# Altium PCB EsoCore_Edge.PcbDoc (part 6 of 6)
Units mil, origin at the board's own origin, x right, y up, seen from the top; angles counter-clockwise.
Board outline 6732.28 x 3385.83 mil, 4 copper layers (Top Layer, Layer 1, Layer 2, Bottom Layer), stack 61.58 mil thick; 330 components, 239 nets, 1236 pads, 712 vias.
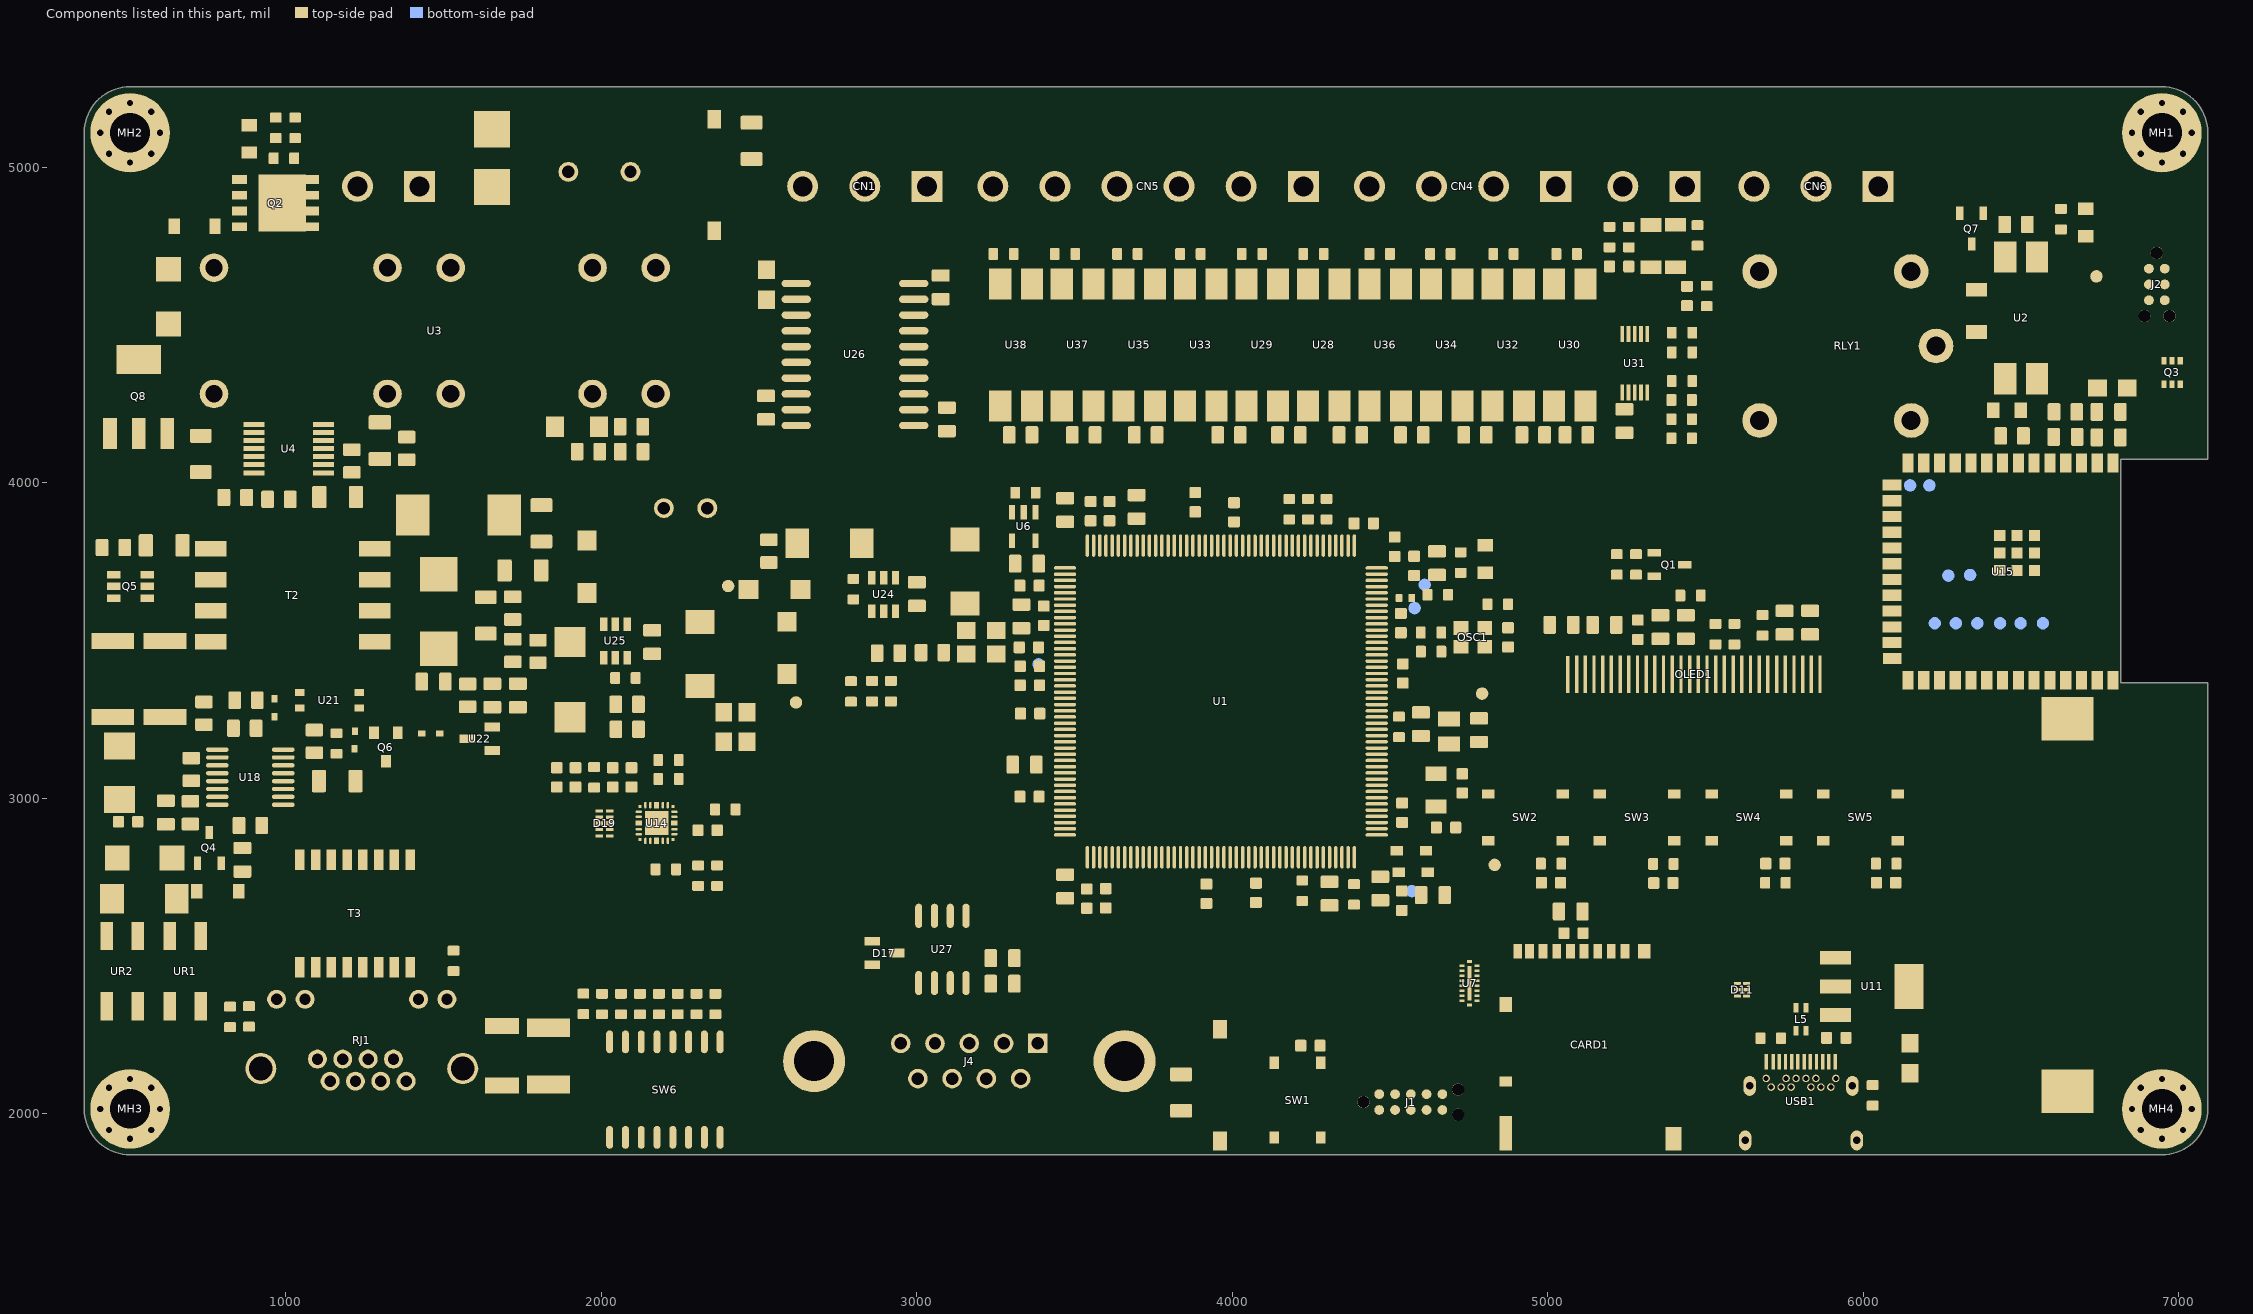
[diagram p7: the components of this part, seen from the top]

## Polygon pours and split planes (outlines as drawn) (continued)
NetCN2_1 on Top Layer "NONET_L-01_P-001" (solid, pour order 25): 1354.8,4993.1 cw(c1376.4,4993.1) 1376.4,5014.7 1730.2,5014.7 cw(c1730.2,4996.5) 1748.4,4996.5 1748.4,4799.3 cw(c1731.9,4799.3) 1731.9,4782.8 1380.9,4782.8 cw(c1380.9,4808.9) 1354.8,4808.9
NetCN2_2 on Top Layer "NONET_L-01_P-001" (solid, pour order 26): 905.46,4799.34 ccw(c925.9,4799.04) 925.6,4778.6 1301.8,4778.6 ccw(c1301.8,4797.1) 1320.3,4797.1 1320.3,4957.1 ccw(c1284.9,4957.1) 1284.9,4992.5 927,4992.5 ccw(c927,4970.96) 905.46,4970.96
EARTH_GND on Top Layer "NONET_L-01_P-001" (solid, pour order 121): 404,2410 ccw(c404,2368) 362,2368 362,2013.9 ccw(c507.64,2013.9) 507.64,1868.25 586.95,1872.17 1911,1882 1911,2166 ccw(c1876,2166) 1876,2201 1626.53,2201 cw(c1626.53,2267) 1560.53,2267 1560.53,2363.47 ccw(c1514,2363.47) 1514,2410
3V3 on Top Layer "NONET_L-01_P-001" (solid, pour order 27): 5092,2565 ccw(c5103.11,2564.89) 5103,2553.79 5148.79,2553.79 ccw(c5148.79,2566) 5161,2566 5161,2662 ccw(c5150,2662) 5150,2673 5099,2673 ccw(c5099,2666) 5092,2666
3V3 on Top Layer "NONET_L-01_P-001" (solid, pour order 30): 4707,2382 ccw(c4707,2374) 4699,2374 4699,2328 ccw(c4708,2328) 4708,2319 4728.29,2319 ccw(c4728.29,2328.42) 4737.71,2328.42 4737.71,2378.29 ccw(c4734,2378.29) 4734,2382
3V3 on Top Layer "NONET_L-01_P-001" (solid, pour order 31): 2013.39,1887.05 2013.39,1982.39 cw(c2027,1982.39) 2027,1996 2367.15,1996 cw(c2367.15,1970.37) 2392.77,1970.37 2392.77,1891.98 cw(c2383.58,1891.98) 2383.58,1882.79 2017.65,1882.79 cw(c2017.65,1887.05)
VBUS on Top Layer "NONET_L-01_P-001" (solid, pour order 32): 5845.33,2176.65 5846.33,2177.65 5846.33,2335.51 cw(c5853.12,2335.51) 5853.12,2342.3 5965.54,2342.3 5965.54,2288.86 cw(c5957.33,2288.86) 5957.33,2280.65 5910.97,2280.65 ccw(c5910.97,2275.03) 5905.35,2275.03 5905.35,2213.96 cw(c5900.33,2213.96) 5900.33,2208.94 5867.59,2208.94 ccw(c5867.59,2198.89) 5857.54,2198.89 5857.54,2178.81 cw(c5855.13,2178.81) 5855.13,2176.4
3V3 on Top Layer "NONET_L-01_P-001" (solid, pour order 33): 2496.31,3804.09 2496.31,3857.31 cw(c2510,3857.31) 2510,3871 2561,3871 cw(c2561,3867) 2565,3867 2565,3799.5 cw(c2558.44,3799.5) 2558.44,3792.94 2502.46,3792.94 cw(c2502.46,3795.55) 2499.84,3795.55
GND2 on Top Layer "NONET_L-01_P-001" (solid, pour order 120): 1001,3346 cw(c1012,3346) 1012,3357 1080,3357 cw(c1080,3348) 1089,3348 1089,3321 cw(c1080,3321) 1080,3312 1011,3312 cw(c1011,3322) 1001,3322
GND2 on Top Layer "NONET_L-01_P-001" (solid, pour order 119): 1080,3079 cw(c1096,3079) 1096,3095 1137,3095 cw(c1137,3084) 1148,3084 1148,3020 cw(c1138,3020) 1138,3010 1089,3010 cw(c1089,3019) 1080,3019
GND2 on Top Layer "NONET_L-01_P-001" (solid, pour order 118): 965,3147 965,3175 cw(c973,3175) 973,3183 1022,3183 cw(c1022,3176) 1029,3176 1029,3153 cw(c1023,3153) 1023,3147
GND2 on Top Layer "NONET_L-01_P-001" (solid, pour order 34): 949,2977 cw(c959,2977) 959,2987 1004,2987 cw(c1004,2984) 1007,2984 1007,2963 cw(c999,2963) 999,2955 954,2955 cw(c954,2960) 949,2960
GND2 on Top Layer "NONET_L-01_P-001" (solid, pour order 37): 766,2956 766,2980 cw(c774,2980) 774,2988 815,2988 cw(c815,2980) 823,2980 823,2950 cw(c815,2950) 815,2942 777,2942 cw(c777,2947) 772,2947
GND2 on Top Layer "NONET_L-01_P-001" (solid, pour order 38): 742,3122 742,3166 cw(c756,3166) 756,3180 812,3180 cw(c812,3170) 822,3170 822,3131 cw(c810,3131) 810,3119
NetC73_2 on Top Layer "NONET_L-01_P-001" (solid, pour order 117): 820,3766 ccw(c820,3775) 829,3775 829,3839 ccw(c815,3839) 815,3853 641,3853 ccw(c641,3847) 635,3847 635,3772 ccw(c641,3772) 641,3766
PVCC on Top Layer "NONET_L-01_P-001" (solid, pour order 42): 1186.17,3158.5 ccw(c1176.81,3158.5) 1176.81,3167.87 1057.87,3167.87 ccw(c1057.87,3155) 1045,3155 1046,3119 1175.72,3119 ccw(c1175.72,3129.46) 1186.17,3129.46
PVCC on Top Layer "NONET_L-01_P-001" (solid, pour order 111): 892,2859 ccw(c886,2859) 886,2865 790,2865 ccw(c790,2846) 771,2846 771,2753.43 ccw(c784,2753.43) 784,2740.43 806.43,2740.43 ccw(c806.43,2749) 815,2749 815,2808 cw(c820,2808) 820,2813 887,2813 ccw(c887,2818) 892,2818
PVCC on Top Layer "NONET_L-01_P-001" (solid, pour order 110): 726,3104 ccw(c726,3112) 734,3112 734,3163 ccw(c727,3163) 727,3170 659,3170 ccw(c659,3165) 654,3165 654,3108 ccw(c658,3108) 658,3104
PVCC on Top Layer "NONET_L-01_P-001" (solid, pour order 107): 945,3270 cw(c955,3270) 955,3280 993,3280 cw(c993,3274) 999,3274 999,3237 cw(c994,3237) 994,3232 949,3232 cw(c949,3236) 945,3236
GND2 on Top Layer "NONET_L-01_P-001" (solid, pour order 106): 382,3227 ccw(c384,3227) 384,3225 684,3225 ccw(c684,3235) 694,3235 694,3324 ccw(c682,3324) 682,3336 381,3336 ccw(c381,3328) 373,3328 373,3234 ccw(c379,3234) 379,3228
GND2 on Top Layer "NONET_L-01_P-001" (solid, pour order 105): 702,3522 cw(c718,3522) 718,3538 818,3538 cw(c818,3530) 826,3530 826,3433 cw(c813,3433) 813,3420 712,3420 cw(c712,3430) 702,3430
NetC73_2 on Top Layer "NONET_L-01_P-001" (solid, pour order 104): 554,3116 cw(c554,3095.64) 574.36,3095.64 574.36,2970.87 ccw(c590.25,2970.87) 590.25,2954.98 716.9,2954.98 ccw(c716.9,2966.57) 728.49,2966.57 728.49,3072.51 ccw(c712,3072.51) 712,3089 643,3089 cw(c643,3093) 639,3093 639,3203 ccw(c629,3203) 629,3213 416,3213 ccw(c416,3201) 404,3201 404,3119 ccw(c407,3119) 407,3116
GND on Top Layer "NONET_L01_P-001" (solid, remove dead copper, pour order 122): 999,2610 cw(c999,2624) 985,2624 985,2925 cw(c1011,2925) 1011,2951 1028.13,2951 ccw(c1028.34,2960.48) 1037.83,2960.27 cw(c1078.5,2911.5) 1078,2975 1116,2975 ccw(c1116,3008) 1149,3008 1149,3797 ccw(c1074,3797) 1074,3872 385,3872 cw(c384.5,3900.5) 356,3900 356,5111.61 cw(c499.39,5111.61) 499.39,5255 6939.67,5255 cw(c6939.67,5109) 7085.67,5109 7085.67,4073.57 cw(c7083.94,4073.57) 7083.94,4071.84 6810.08,4071.84 6810.08,3364.91 7080.28,3364.91 cw(c7080.28,3359.18) 7086,3359.18 7086,2014.84 cw(c6936.16,2014.84) 6936.16,1865 6661,1865 1956,1871 cw(c1956,1892) 1935,1892 1935,2201 ccw(c1915,2201) 1915,2221 1597,2221 cw(c1597,2227) 1591,2227 1591,2422 ccw(c1579.52,2422) 1579.52,2433.48 1483.26,2433.48 cw(c1483.26,2467.74) 1449,2467.74 1449,2584 ccw(c1423,2584) 1423,2610
NetC87_1 on Top Layer "NONET_L01_P-001" (solid, remove dead copper, pour order 103): 2337,3500 ccw(c2337,3519) 2356,3519 2356,3645 ccw(c2336.5,3645.5) 2337,3665 2147,3665 ccw(c2147,3648) 2130,3648 2132.06,3505.69 ccw(c2137.75,3505.69) 2137.75,3500
NetC72_2 on Top Layer "NONET_L01_P-001" (solid, remove dead copper, pour order 97): 1443.4,3767 1430,3767 ccw(c1430,3754.7) 1417.7,3754.7 1417.7,3627.2 ccw(c1433.38,3627.12) 1433.3,3611.44 1696.28,3611.44 ccw(c1696.28,3646.16) 1731,3646.16 1731,4670 ccw(c1676.5,4672.5) 1679,4727 1509,4727 ccw(c1509,4697) 1479,4697 1479,4066 ccw(c1522,4066) 1522,4023 cw(c1522,4007) 1538,4007 1538,3790 cw(c1515,3790) 1515,3767
NetR47_1 on Top Layer "NONET_L01_P-001" (solid, remove dead copper, pour order 96): 1219,3676 ccw(c1245,3676) 1245,3650 1352,3650 ccw(c1352,3669) 1371,3669 1371,3783.08 cw(c1390.46,3783.08) 1390.46,3802.54 1473.54,3802.54 ccw(c1473.54,3824) 1495,3824 1495,3949 ccw(c1456,3949) 1456,3988 1297,3988 ccw(c1297,3969) 1278,3969 1278,3919 cw(c1256,3919) 1256,3897 1235,3897 ccw(c1235,3878) 1216,3878
NetQ5_1 on Top Layer "NONET_L01_P-001" (solid, remove dead copper, pour order 95): 815,3750 cw(c815,3727) 838,3727 838,3674 cw(c819,3674) 819,3655 805,3655.25 461.99,3657.81 453,3659 cw(c453,3675) 437,3675 437,3729 cw(c458,3729) 458,3750
+VIN on Top Layer "NONET_L01_P-001" (solid, remove dead copper, pour order 43): 2878,3685.5 cw(c2868.4,3685.5) 2868.4,3675.9 2757.35,3675.9 cw(c2757.35,3685.25) 2748,3685.25 2748,3857 cw(c2758,3857) 2758,3867 2870,3867 cw(c2870,3859) 2878,3859
+VIN2 on Top Layer "NONET_L01_P-001" (solid, remove dead copper, pour order 94): 1881.44,3567.09 1881.44,3630.09 cw(c1910.44,3630.09) 1910.44,3659.09 2001.44,3659.09 cw(c2001.44,3646.09) 2014.44,3646.09 2014.44,3544.09 cw(c1998.44,3544.09) 1998.44,3528.09 1898.44,3528.09 cw(c1898.44,3544.09) 1882.44,3544.09
3V3 on Top Layer "NONET_L01_P-001" (solid, remove dead copper, pour order 93): 4521,3722 ccw(c4521,3736) 4535,3736 4535,3778 ccw(c4523,3778) 4523,3790 4424,3790 ccw(c4424,3783) 4417,3783 4417,3729 ccw(c4424,3729) 4424,3722
3V3 on Top Layer "NONET_L01_P-001" (solid, remove dead copper, pour order 92): 4669.95,3670.44 4718.56,3670.44 cw(c4718.56,3664) 4725,3664 4725,3620 cw(c4719,3620) 4719,3614 4676,3614 cw(c4676,3621) 4669,3621
VDD_SDC on Top Layer "NONET_L01_P-001" (solid, remove dead copper, pour order 90): 3580,2834 3461,2834 ccw(c3461,2817) 3444,2817 3444,2748 ccw(c3452,2748) 3452,2740 3572,2740 ccw(c3572,2751) 3583,2751
NetC72_2 on Top Layer "NONET_L01_P-001" (solid, remove dead copper, pour order 89): 2476,3595 ccw(c2476,3580) 2461,3580 2461,3528 ccw(c2474,3528) 2474,3515 2618,3515 ccw(c2618,3518) 2621,3518 2621,3581 ccw(c2607,3581) 2607,3595
+5V_OUT on Top Layer "NONET_L01_P-001" (solid, remove dead copper, pour order 88): 2684,3444 cw(c2684,3429) 2699,3429 2699,3244 cw(c2688,3244) 2688,3233 2281,3233 cw(c2281,3272) 2242,3272 2242,3417 cw(c2269,3417) 2269,3444
3V3 on Top Layer "NONET_L01_P-001" (solid, remove dead copper, pour order 87): 2577,3694 cw(c2585,3694) 2585,3702 2680,3702 cw(c2680,3688) 2694,3688 2694,3607 cw(c2681,3607) 2681,3594 2588,3594 cw(c2588,3604) 2578,3604
3V3 on Top Layer "NONET_L01_P-001" (solid, remove dead copper, pour order 86): 3360,3989 cw(c3371,3989) 3371,4000 3431,4000 cw(c3431,3994) 3437,3994 3437,3885 cw(c3427,3885) 3427,3875 3364,3875 cw(c3364,3879) 3360,3879
1V2 on Top Layer "NONET_L01_P-001" (solid, remove dead copper, pour order 85): 3340.98,3816.98 cw(c3350,3816.98) 3350,3826 3410,3826 cw(c3410,3816) 3420,3816 3420,3714.81 cw(c3414.24,3714.88) 3414.17,3709.12 cw(c3413,3715.01) 3413,3709 3348.18,3709 cw(c3348.18,3716.2) 3340.98,3716.2
NetC42_1 on Top Layer "NONET_L-01_P-001" (solid, pour order 44): 2129.26,3049.17 ccw(c2120.26,3049.17) 2120.26,3058.17 1841.26,3058.17 ccw(c1841.26,3050.17) 1833.26,3050.17 1833.26,2995.17 ccw(c1839.26,2995.17) 1839.26,2989.17 2074.26,2989.17 cw(c2074.26,2980.17) 2083.26,2980.17 2083.26,2969.17 ccw(c2086.26,2969.17) 2086.26,2966.17 2121.26,2966.17 ccw(c2121.26,2974.17) 2129.26,2974.17
3V3 on Top Layer "NONET_L01_P-001" (solid, remove dead copper, pour order 84): 3061,3628.2 3102.6,3669.8 3193.8,3669.8 3207.7,3655.9 3208,3647.3 3208,3358.64 cw(c3184.59,3358.64) 3184.59,3335.24 2765.67,3335.24 cw(c2765.67,3344.91) 2756,3344.91 2756,3383 cw(c2772,3383) 2772,3399 3052,3399 ccw(c3052,3408) 3061,3408
NetC83_1 on Top Layer "NONET_L01_P-001" (solid, remove dead copper, pour order 83): 3021.06,3657.56 ccw(c3021.06,3672.5) 3036,3672.5 3036,3755.3 cw(c3047.7,3755.3) 3047.7,3767 3201,3767 ccw(c3201,3774.6) 3208.6,3774.6 3208.6,3856.7 ccw(c3195.8,3857.2) 3196.3,3870 2971,3870 ccw(c2971,3853) 2954,3853 2954,3672 ccw(c2968.22,3671.78) 2968,3657.56
3V3 on Top Layer "NONET_L01_P-001" (solid, remove dead copper, pour order 81): 3241,2365 ccw(c3241,2377) 3253,2377 3253,2516 ccw(c3240,2516) 3240,2529 3138,2529 ccw(c3138,2518) 3127,2518 3127,2367 ccw(c3129,2367) 3129,2365
3V3 on Top Layer "NONET_L01_P-001" (solid, remove dead copper, pour order 45): 5483,3519 ccw(c5474,3519) 5474,3528 5210,3528 ccw(c5210,3506) 5188,3506 5188,3422 ccw(c5193,3422) 5193,3417 5469,3417 ccw(c5469,3432) 5484,3432
3V3 on Top Layer "NONET_L01_P-001" (solid, remove dead copper, pour order 80): 4506.58,3380.49 cw(c4515.47,3380.49) 4515.47,3389.37 4551.63,3389.37 cw(c4551.5,3375.45) 4565.42,3375.32 4565.42,3235.02 cw(c4549.88,3235.02) 4549.88,3219.49 4524.51,3219.49 cw(c4524.3,3237.21) 4506.58,3237
VDDA on Top Layer "NONET_L01_P-001" (solid, remove dead copper, pour order 78): 4560.77,3736.94 ccw(c4560.75,3725.1) 4548.92,3725.12 4548.92,3616.5 ccw(c4552.42,3616.5) 4552.42,3613 4638,3613 ccw(c4638,3626.25) 4651.25,3626.25 4651.25,3665.83 cw(c4662.42,3665.83) 4662.42,3677 4668,3677 ccw(c4668,3692) 4683,3692 4683,3723 ccw(c4669.06,3723) 4669.06,3736.94
VDD_SDC on Top Layer "NONET_L01_P-001" (solid, remove dead copper, pour order 77): 4830,3234.85 cw(c4811.13,3234.85) 4811.13,3215.98 4656.51,3215.98 cw(c4656.51,3224.49) 4648,3224.49 4648,3233 4649.69,3292.01 cw(c4660.84,3291.85) 4661,3303 4818,3303 cw(c4818,3291) 4830,3291
3V3 on Top Layer "NONET_L-01_P-001" (solid, pour order 65): 6550.9,4433.7 6500,4382.8 6499.65,4325.19 cw(c6482,4328.7) 6482,4310.7 6438,4310.7 cw(c6438,4330.7) 6418,4330.7 6418,4461.6 6492.3,4533.7 6762,4533.7 cw(c6762,4509.7) 6786,4509.7 6786,4125.7 cw(c6768,4125.7) 6768,4107.7 ccw(c6768,4097.7) 6758,4097.7 6758,4028.7 cw(c6750,4028.7) 6750,4020.7 6721,4020.7 cw(c6721,4025.7) 6716,4025.7 6716,4172.7 ccw(c6700,4172.7) 6700,4188.7 6664,4188.7 cw(c6663.3,4213) 6639,4212.3 6639,4417.7 ccw(c6623,4417.7) 6623,4433.7
3V3 on Top Layer "NONET_L-01_P-001" (solid, pour order 52): 4359,2846 cw(c4373,2846) 4373,2860 4482,2860 cw(c4482,2849) 4493,2849 4493,2737 cw(c4486,2737) 4486,2730 4367,2730 cw(c4367,2738) 4359,2738
3V3 on Top Layer "NONET_L-01_P-001" (solid, pour order 51): 3502,3125 3502,3092 3371,3092 3371,3125
NetC24_2 on Top Layer "NONET_L-01_P-001" (solid, pour order 46): 4618,3209 cw(c4618,3202) 4625,3202 4625,3172.57 cw(c4611.88,3172.57) 4611.88,3159.45 4428.55,3159.45 cw(c4428.67,3166.87) 4421.25,3166.99 4423,3209
EARTH_GND on Layer 2 "NONET_L-01_P-001" (solid, pour order 116): 404,2410 ccw(c404,2368) 362,2368 362,2013.9 ccw(c507.64,2013.9) 507.64,1868.25 586.95,1872.17 1911,1882 1911,2166 ccw(c1876,2166) 1876,2201 1626.53,2201 cw(c1626.53,2267) 1560.53,2267 1560.53,2363.47 ccw(c1514,2363.47) 1514,2410
GND on Layer 2 "NONET_L-01_P-001" (solid, pour order 113): 6558,5257 6955,5257 cw(c6955,5122) 7090,5122 7090,4084 cw(c7075,4084) 7075,4069 6815,4069 ccw(c6815,4063) 6809,4063 6809,3365.98 ccw(c6810.08,3365.98) 6810.08,3364.91 7078.09,3364.91 cw(c7078.09,3351) 7092,3351 7092,2014.84 cw(c6949.16,2014.84) 6949.16,1872 1947,1872 cw(c1947,1885) 1934,1885 1934,2203 ccw(c1916,2203) 1916,2221 1617,2221 cw(c1617,2241) 1597,2241 1597,2417.9 ccw(c1581.95,2417.9) 1581.95,2432.95 1212.05,2432.95 cw(c1212.05,2488) 1157,2488 1157,3768 ccw(c1057,3768) 1057,3868 442,3868 cw(c442,3946) 364,3946 364,5113.61 cw(c515.39,5113.61) 515.39,5265 940,5265
NetC73_2 on Layer 2 "NONET_L-01_P-001" (solid, pour order 53): 383,3164 ccw(c403,3164) 403,3144 627.01,3144 ccw(c626.89,3155.76) 638.65,3155.88 ccw(c625.01,3159) 639,3159 639,3207.14 ccw(c636.07,3207.14) 636.07,3210.07 580,3210.07 cw(c579.96,3222.04) 568,3222 568,3485 ccw(c554,3485) 554,3499 495,3499 cw(c495,3522) 472,3522 472,3731 cw(c502,3731) 502,3761 799,3761 ccw(c799,3775) 801.73,3761.27 ccw(c801.89,3766.38) 807,3766.22 807,3847 ccw(c803,3847) 803,3851 415,3851 ccw(c415,3819) 383,3819
+VIN on Layer 2 "NONET_L-01_P-001" (solid, pour order 28): 2055,4192 ccw(c2089,4192) 2089,4158 2505,4158 cw(c2505,4123) 2540,4123 2540,3968 ccw(c2564,3968) 2564,3944 2809,3944 cw(c2809,3926) 2827,3926 2827,3747 cw(c2813,3747) 2813,3733 2735.37,3733 cw(c2735.37,3745.01) 2723.36,3745.01 2723.36,3814.64 ccw(c2691,3814.64) 2691,3847 2443,3847 cw(c2443,3862) 2428,3862 2428,3977 ccw(c2408,3977) 2408,3997 1913,3997 cw(c1913,4017) 1893,4017 1893,4704 cw(c1920,4704) 1920,4731 2029.2,4731 cw(c2029.01,4707.6) 2052.42,4707.42 cw(c1995.01,4690) 2055,4690
+VIN on Layer 2 "NONET_L-01_P-001" (solid, pour order 102): 1258,4251 ccw(c1286,4251) 1286,4223 1340,4223 ccw(c1340,4263) 1380,4263 1380,4702 ccw(c1342,4702) 1342,4740 1305,4740 ccw(c1305,4693) 1258,4693
PVCC on Layer 2 "NONET_L-01_P-001" (solid, pour order 29): 647,3273 cw(c661,3273) 661,3287 1130,3287 cw(c1130,3269) 1148,3269 1148,3118.89 cw(c1125.32,3118.98) 1125.23,3096.29 cw(c1116.5,3125.06) 1116.5,3095 1086,3095 ccw(c1086,3081) 1072,3081 1072,3041 cw(c1053,3041) 1053,3022 1025,3022 cw(c1025,3061) 986,3061 986,3091 ccw(c965,3091) 965,3112 875,3112 ccw(c875,3103) 866,3103 866,2782 cw(c832,2782) 832,2748 784,2748 cw(c784,2783) 749,2783 749,3071.34 ccw(c728.84,3071.34) 728.84,3091.5 708.67,3091.5 cw(c708.67,3124.17) 705.47,3091.66 662.34,3091.66 cw(c662.34,3107) 647,3107
+24v on Layer 2 "NONET_L01_P-001" (solid, remove dead copper, pour order 101): 752.2,4237.8 cw(c752.2,4274.7) 715.3,4274.7 715.3,4346.4 cw(c747.9,4346.4) 747.9,4379 822.4,4379 ccw(c822.4,4390.4) 833.8,4390.4 833.8,4781.31 cw(c882.08,4781.12) 882.27,4829.39 cw(c901.2,4767) 901.2,4832.2 1977.9,4832.2 ccw(c1978.65,4857.75) 2004.2,4857 2004.2,5159.1 cw(c2064.4,5159.1) 2064.4,5219.3 2239.2,5219.3 cw(c2239.2,5196.3) 2262.2,5196.3 2262.2,4263.14 cw(c2229.12,4263.21) 2229.05,4230.13 cw(c2226.5,4255.98) 2226.5,4230 2122.5,4230 cw(c2122.5,4259) 2093.5,4259 2093.5,4724.4 ccw(c2070.6,4724.4) 2070.6,4747.3 974.3,4747.3 ccw(c974.3,4699) 926,4699 926,4249.1 cw(c914.7,4249.1) 914.7,4237.8
NetC72_2 on Layer 2 "NONET_L01_P-001" (solid, remove dead copper, pour order 67): 1724,3772 1724,3724 ccw(c1773,3724) 1773,3675 2488,3675 cw(c2488,3648) 2515,3648 2515,3466.79 cw(c2489.92,3466.89) 2489.82,3441.81 cw(c2475.57,3467.56) 2476,3438.13 1496,3438.13 cw(c1496,3538.13) 1396,3538.13 1396,4636 1396,4670 cw(c1444,4670) 1444,4718 1682.67,4718 cw(c1682.43,4676.96) 1723.47,4676.72 cw(c1635.13,4667.01) 1724,4668
VDD_SDC on Layer 2 "NONET_L01_P-001" (solid, remove dead copper, pour order 54): 4839,3485 ccw(c4810,3485) 4810,3514 4287,3514 ccw(c4287,3500) 4273,3500 4273,2758.42 ccw(c4293.42,2758.42) 4293.42,2738 4359,2738 ccw(c4359,2759) 4380,2759 4380,3129.75 cw(c4422.03,3129.76) 4422.03,3171.79 cw(c4426.38,3127.62) 4426.38,3172 4435,3172 ccw(c4435,3191) 4454,3191 4454,3365 cw(c4479,3365) 4479,3390 4707,3390 cw(c4707,3370) 4727,3370 4725.83,3277.28 ccw(c4755.11,3277.28) 4755.11,3248 4820,3248 ccw(c4820,3267) 4839,3267
VDD_SDC on Layer 2 "NONET_L01_P-001" (solid, remove dead copper, pour order 63): 3721,2922 ccw(c3748,2922) 3748,2895 4258,2895 ccw(c4258,2910) 4273,2910 cw(c4277,2910) 4277,2914 4298,2914 cw(c4298,2904) 4308,2904 4308,2764 cw(c4297,2764) 4297,2753 4259.52,2753 cw(c4259.52,2765.52) 4247,2765.52 ccw(c4232.52,2765.52) 4232.52,2780 4231,2782.21 3596.98,2782.33 cw(c3587,2789) 3587,2777 3519,2777 3517,2778 3517,3771 cw(c3543,3771) 3543,3797 3630,3797 ccw(c3630,3813) 3646,3813 3646,3866 cw(c3655,3866) 3655,3875 3708,3875 cw(c3708,3862) 3721,3862
3V3 on Layer 2 "NONET_L01_P-001" (solid, remove dead copper, pour order 66): 2366,3157 cw(c2366,3118) 2405,3118 2405,2871 ccw(c2421,2872) 2422,2856 2897,2856 ccw(c2897,2899) 2940,2899 2940,3429 ccw(c2890,3429) 2890,3479 2626,3479 cw(c2624.5,3507.5) 2596,3506 2596,3677 ccw(c2573,3677) 2573,3700 2527,3700 cw(c2527,3745) 2482,3745 2482,4571 cw(c2517,4571) 2517,4606 6414,4606 cw(c6413,4508) 6511,4507 6511,2295 cw(c6411,2295) 6411,2195 5968,2195 cw(c5968,2239) 5924,2239 ccw(c5833,2239) 5833,2330 4674,2330 ccw(c4674,2312) 4656,2312 4656,1986 cw(c4634,1986) 4634,1964 4380,1964 cw(c4380,2014) 4330,2014 4330,2333 ccw(c4286,2333) 4286,2377 2470,2377 ccw(c2470,2348) 2441,2348 2441,1956 cw(c2423,1956) 2423,1938 2025,1938 cw(c2026.5,1958.5) 2006,1960 2006,2116 cw(c2048,2116) 2048,2158 2120,2158 2218,2158 ccw(c2218,2198) 2258,2198 2258,2669 ccw(c2199,2669) 2199,2728 1872,2728 cw(c1872,2751) 1849,2751 1849,3116 cw(c1890,3116) 1890,3157
1V2 on Layer 2 "NONET_L01_P-001" (solid, remove dead copper, pour order 11): 3481,3801 cw(c3481,3783.58) 3498.42,3783.58 3498.42,3325.31 cw(c3487.32,3325.31) 3487.32,3314.2 3386.82,3314.2 cw(c3386.82,3342.77) 3358.25,3342.77 3358.25,3447.25 cw(c3380,3447.25) 3380,3469 3420,3469 ccw(c3420,3486) 3437,3486 3437,3700 ccw(c3426,3700) 3426,3711 3370,3711 cw(c3370,3724) 3357,3724 3357,3790 cw(c3368,3790) 3368,3801
EARTH_GND on Bottom Layer "NONET_L-01_P-001" (solid, pour order 23): 404,2410 ccw(c404,2368) 362,2368 362,2013.9 ccw(c507.64,2013.9) 507.64,1868.25 586.95,1872.17 1911,1882 1911,2166 ccw(c1876,2166) 1876,2201 1626.53,2201 cw(c1626.53,2267) 1560.53,2267 1560.53,2363.47 ccw(c1514,2363.47) 1514,2410
GND on Bottom Layer "NONET_L-01_P-001" (solid, pour order 112): 1159,3365 ccw(c1213,3365) 1213,3311 1380,3311 cw(c1380,3263) 1428,3263 1428,2487 ccw(c1479,2486) 1478,2435 1577,2435 cw(c1577,2428) 1584,2428 1584,2248 ccw(c1604,2248) 1604,2228 1895,2228 cw(c1895,2173) 1950,2173 1950,1892 6930,1870 6947.16,1870 ccw(c6947.16,2013.84) 7091,2013.84 7091,3362.18 ccw(c7087.28,3362.18) 7087.28,3365.91 6817.08,3365.91 6817.08,4072.84 7092.16,4072.84 7092.16,5110.51 ccw(c6946.67,5110.51) 6946.67,5256 466,5256 ccw(c466,5156) 366,5156 366,3896 ccw(c393,3896) 393,3869 1098,3869 cw(c1098,3808) 1159,3808
3V3 on Bottom Layer "NONET_L-01_P-001" (solid, pour order 20): 2500.32,3866.99 cw(c2517.33,3866.99) 2517.33,3884 2549.66,3884 cw(c2549.66,3869.83) 2563.83,3869.83 2563.83,3838.83 cw(c2554,3838.83) 2554,3829 2508.96,3829 cw(c2508.96,3836.32) 2501.64,3836.32
+VIN on Bottom Layer "NONET_L-01_P-001" (solid, pour order 109): 1245,4710 cw(c1283,4710) 1283,4748 1370,4748 cw(c1370,4734) 1384,4734 1384,4586 ccw(c1411,4586) 1411,4559 1883,4559 ccw(c1883,4582) 1906,4582 1906,4718 cw(c1938,4718) 1938,4750 2028,4750 cw(c2028,4735) 2043,4735 2043,4249 cw(c2011,4249) 2011,4217 1925,4217 cw(c1925,4250) 1892,4250 1892,4389 ccw(c1873,4389) 1873,4408 1412,4408 ccw(c1412,4389) 1393,4389 1393,4260 cw(c1358,4260) 1358,4225 1259,4225 cw(c1259,4239) 1245,4239
+5V_OUT on Bottom Layer "NONET_L01_P-001" (solid, remove dead copper, pour order 91): 2656,3359 cw(c2667,3359) 2667,3370 2699,3370 cw(c2699,3366) 2703,3366 2703,3287 cw(c2696,3287) 2696,3280 2672,3280 cw(c2672,3296) 2656,3296 2656,3302
VDD_SDC on Bottom Layer "NONET_L01_P-001" (solid, remove dead copper, pour order 100): 4723,3284.11 ccw(c4732.65,3284.11) 4732.65,3274.46 4749.46,3274.44 4803.19,3274.44 ccw(c4803.19,3280.84) 4809.59,3280.84 4809.59,3297.73 ccw(c4798.93,3297.73) 4798.93,3308.4 4736.18,3308.4 ccw(c4736.18,3295.22) 4723,3295.22
EARTH_GND on Layer 1 "NONET_L-01_P-001" (solid, pour order 114): 404,2410 ccw(c404,2368) 362,2368 362,2013.9 ccw(c507.64,2013.9) 507.64,1868.25 586.95,1872.17 1911,1882 1911,2166 ccw(c1876,2166) 1876,2201 1626.53,2201 cw(c1626.53,2267) 1560.53,2267 1560.53,2363.47 ccw(c1514,2363.47) 1514,2410
GND2 on Layer 1 "NONET_L-01_P-001" (solid, pour order 98): 386,3550 ccw(c386,3531) 367,3531 367,2926 ccw(c396.5,2925.5) 396,2896 989,2896 ccw(c989,2911) 1004,2911 1004,2929 cw(c1090,2929) 1090,3015 1126,3015 ccw(c1126,3037) 1148,3037 1148,3501 ccw(c1099,3501) 1099,3550
GND on Layer 1 "NONET_L01_P-001" (solid, remove dead copper, pour order 82): 1545,2434.48 1255,2434.48 cw(c1255,2534.48) 1155,2534.48 1155.37,2788 1155.37,3002.59 ccw(c1123.02,3009) 1156,3009 1156,3798 ccw(c1081,3798) 1081,3873 392,3873 cw(c391.5,3901.5) 363,3901 363,5112.61 cw(c506.39,5112.61) 506.39,5256 6946.67,5256 cw(c6946.67,5110) 7092.67,5110 7092.67,4074.57 cw(c7090.94,4074.57) 7090.94,4072.84 6817.08,4072.84 6817.08,3365.91 7087.28,3365.91 cw(c7087.28,3360.18) 7093,3360.18 7093,2015.84 cw(c6943.16,2015.84) 6943.16,1866 6668,1866 1963,1872 cw(c1963,1893) 1942,1893 1942,2202 ccw(c1922,2202) 1922,2222 1604,2222 cw(c1604,2228) 1598,2228 1598,2423 ccw(c1586.52,2423) 1586.52,2434.48

## Keep-outs
Keep-Out Layer:
  the board outline again, w0.5

## Other copper
Top Layer:
  pour cut-out: 2936.91,4539.69 ccw(c2936.91,4542.78) 2940,4542.78 2940,4635 ccw(c2942.99,4635) 2942.99,4632.01 3051.2,4632.01 cw(c3051.2,4616.72) 3066.5,4616.72 3066.5,4534.3 cw(c3062.8,4534.3) 3062.8,4530.6
  pour cut-out: 3004,3962 3066,3962 ccw(c3066,3959.3) 3063.3,3959.3 3063.3,3915.8 cw(c3062.3,3915.8) 3062.3,3914.8 2998.7,3914.8
  pour cut-out: 2652.52,4351.08 ccw(c2652.52,4358.38) 2659.83,4358.38 2659.83,4464.37 cw(c2660.87,4464.37) 2660.87,4465.42 2733.42,4465.42 cw(c2733.42,4443.84) 2755,4443.84 2755,3948.72 cw(c2726.65,3948.72) 2726.65,3920.36 2715.64,3920.36 cw(c2715.64,3938) 2698,3938 2698,4307.24 ccw(c2673.24,4307.24) 2673.24,4332
  pour cut-out: 6348.8,4075.6 6359.86,4086.66 6359.86,4146.17 6535.39,4146.17 6538.22,4149 6545.2,4142.02 6545.2,4081.3
  pour cut-out: 6402.5,4204.4 6402.5,4264.4 6416.4,4278.3 6421.82,4272.88 6507.57,4272.88 6507.57,4376.67 6551.9,4421 6628.51,4421 6630.69,4418.82 6623,4411.13 6623,4189.69 6550.29,4189.69 6526.7,4166.1
  pour cut-out: 2455,2882 2464,2891 2464,2928 2814.4,2928 2814,2928.4 2814,3280.48 2851.27,3280.48 2852,3281.21 2852,2894.76 2826.4,2869.16 2822.55,2873 2507,2873
Bottom Layer:
  pour cut-out: 3567.1,3990.2 3550.3,3990.2 cw(c3550.3,3996.7) 3543.8,3996.7 3543.8,4027.2 cw(c3546.4,4027.2) 3546.4,4029.8 4164.2,4029.8 cw(c4164.2,4011) 4183,4011 4183,3976.1 cw(c4168,3976.1) 4168,3961.1 4009.43,3961.1 cw(c4009.43,3974.77) 3995.77,3974.77 ccw(c3973.53,3974.77) 3973.53,3997 3934.31,3997
  pour cut-out: 3818.3,3330.6 cw(c3820.4,3330.6) 3820.4,3332.7 3850.8,3332.7 cw(c3850.8,3326.72) 3856.78,3326.72 3856.78,3303.35 cw(c3852.33,3303.35) 3852.33,3298.89 3830.13,3298.89
  pour cut-out: 2340.82,3160.19 2340.88,3160.13 2340.88,2998.1 2351.77,2998.1 ccw(c2351.77,3098.1) 2422.48,3027.39 2440.94,3045.85 cw(c2454.32,3059.23) 2435.4,3059.23 2435.4,3157.1
  pour cut-out: 1384.6,2300.9 1384.6,2397.7 cw(c1405.9,2397.7) 1405.9,2419 1524.27,2419 cw(c1524.27,2396.37) 1546.9,2396.37 1546.9,2311.8 cw(c1532.8,2311.8) 1532.8,2297.7
  pour cut-out: 2350.1,3202.2 ccw(c2355.75,3234.65) 2388.2,3229 3905,3229 cw(c3905,3214.87) 3919.13,3214.87 3919.13,3151.89 ccw(c3910.82,3151.89) 3910.82,3160.19 2340.82,3160.19
  pour cut-out: 3081,2627.5 cw(c3081,2585.88) 3110.43,2615.31 3126,2599.74 ccw(c3099.44,2626.3) 3137,2626.3 3137,2937 3073,2937
  pour cut-out: 4114,2456 4116.32,2458.32 ccw(c4073.64,2501) 4134,2501 4452.17,2501 cw(c4452.17,2494.17) 4457,2499 ccw(c4464.24,2491.76) 4454,2491.76 4454,2445
  pour cut-out: 2925,4626 2938.56,4626 cw(c2938.56,4593.56) 2971,4593.56 2971,4345 cw(c2955,4345) 2955,4329 2920,4329 cw(c2920,4341) 2908,4341
  pour cut-out: 2798.49,3291.19 2884.19,3291.19 ccw(c2884.19,3309) 2902,3309 2902,4049 ccw(c2878,4049) 2878,4073 2836,4073 ccw(c2836,4054) 2817,4054
  pour cut-out: 4498,2099 4656,2099 cw(c4656,2087) 4668,2087 4668,1990 cw(c4640,1990) 4640,1962 4486,1962 cw(c4486,1982) 4466,1982 4466,2084.39 cw(c4476.16,2084.39) 4476.16,2094.55

## Silkscreen, mask and mechanical layers (free items; w line width, h text height)
Top Overlay:
  text "Reverse Polerity Indicator" at 831.8,5017.64 h40 r90
  text "120 OHM TERMINATION" at 2294.52,4819.3 h30 r90
  text "-" at 1196.05,4781.7 h60
  text "+" at 1413.7,4776.8 h60
  text "POWER" at 6783.86,4761.4 h40 r90
  text "RX" at 6989,4672 h30
  text "3V3" at 6821,4668.33 h30
  text "DTR" at 6991,4625 h30
  text "TX" at 6831,4618 h30
  text "GND" at 6986,4574.33 h30
  text "RST" at 6826,4570.33 h30
  text "NC" at 4625.72,2127.19 h25 r90
  text "TDI" at 4571,2123.4 h25 r90
  text "SWO" at 4675.72,2107 h25 r90
  text "TRST" at 4520.72,2099.51 h25 r90
  text "RESET#" at 4473.72,2072 h25 r90
  text "RESET SWITCH" at 4094.67,1940 h30 r90
  text "120 OHM TERMINATION" at 4042.67,1924 h30 r90
  text "GND" at 4573.72,1918 h25 r90
  text "3V3" at 4475.72,1912 h25 r90
  text "SWDIO" at 4526.72,1912 h25 r90
  text "SWCLK" at 4625.72,1912 h25 r90
  text "GND" at 4680.72,1912 h25 r90
Bottom Overlay:
  lines w10: 1126.8,4830.3 1523.2,4830.3 1523.2,5215.5 1126.8,5215.5 1126.8,4830.3 ; 2531.1,4831.8 3126.5,4831.8 3126.5,5215.3 2531.1,5215.3 2531.1,4831.8 ; 3173,4834.4 5100,4834.4 5100,5215.5 3173,5215.5 3173,4834.4 ; 5115.8,4836.3 5542.1,4836.3 5542.1,5216.1 5115.8,5216.1 5115.8,4836.3 ; 5559.3,4838.2 6117.5,4838.2 6117.5,5214.3 5559.3,5214.3 5559.3,4838.2
  text "24V DIGITAL INPUT" at 4361.06,5129.07 h60
  text "RELAY OUT" at 5978.1,5124.47 h60
  text "ANALOG INPUT" at 5526.3,5093.87 h60
  text "GND" at 2711.1,5029.57 h60
  text "B" at 2851.1,5030.23 h60
  text "A" at 3057,5030.23 h60
  text "NO" at 5699.84,5029.57 h60
  text "COM" at 5907.1,5029.57 h60
  text "NC" at 6083.2,5029.57 h60
  text "-   +" at 1175.3,5007.6 h60
  text "2" at 5255.46,5005.7 h60
  text "1" at 5448.3,5005.7 h60
  text "7" at 3849.7,5002.58 h60
  text "5" at 4241.8,5002.58 h60
  text "10" at 3268.8,5001.92 h60
  text "9" at 3454.2,5001.92 h60
  text "8" at 3650,5001.92 h60
  text "6" at 4049.8,5001.92 h60
  text "4" at 4451.9,5002.08 h60
  text "3" at 4646.6,5001.92 h60
  text "2" at 4842.46,5001.92 h60
  text "1" at 5043.75,5001.92 h60
Top Solder:
  region: 561 vertices and 0 holes, not listed, extent 6156.75,4977.17 6348.63,5171.4
  text "EsoCore" at 6375,5116.87 h78.74
  text "Edge" at 6375,5052.87 h78.74
  text "V1" at 6375,4983 h78.74
Mechanical 1:
  circle w0.25: c4935.06,3225.06 r0.12
  circle w0.5: c5637.82,2939.63 r98.43
  circle w0.5: c5992.15,2939.63 r98.43
  circle w0.5: c5283.49,2939.63 r98.43
  circle w0.5: c4929.15,2939.63 r98.43
  lines w0.5: 4929.15,2939.63 5283.49,2939.63 5460.65,2939.63 ; 5460.65,3225.06 5460.65,3040.02 5460.65,2939.63 ; 5992.15,2939.63 5637.82,2939.63 5460.65,2939.63 ; 4935.06,3225.06 5986.24,3225.06 5986.24,3983.52 4935.06,3983.52 4935.06,3225.06

## Text inside footprints (layer, text, board x,y; h text height)
J4: Top Overlay "1" at 3455.65,2244.99 h35 r180; Top Overlay "5" at 2898.65,2240.99 h35 r180; Top Overlay "9" at 2902.65,2120.99 h35 r180; Top Overlay "6" at 3456.65,2126.99 h35 r180
OLED1: Top Overlay "OLED_128X64" at 5288.04,3158.04 h59.05; Top Overlay "30" at 5843.04,3273.04 h20
SW7: Top Overlay "ON" at 2341.85,5074.42 h19.68; Top Overlay "1" at 2350.52,4852.78 h39.37
SW8: Top Overlay "1" at 3968.48,2214.22 h39.37 r180; Top Overlay "ON" at 3977.15,1992.58 h19.68 r180
U3: Top Overlay "-" at 847.98,4641.44 h80; Top Overlay "+" at 846.01,4247.74 h80